# Altium PCB PCB_V1.0.0.PcbDoc
Units mil, origin at the board's own origin, x right, y up, seen from the top; angles counter-clockwise.
Board outline 1574.8 x 3937.01 mil, 2 copper layers (Top Layer, Bottom Layer); 42 components, 31 nets, 149 pads, 58 vias.
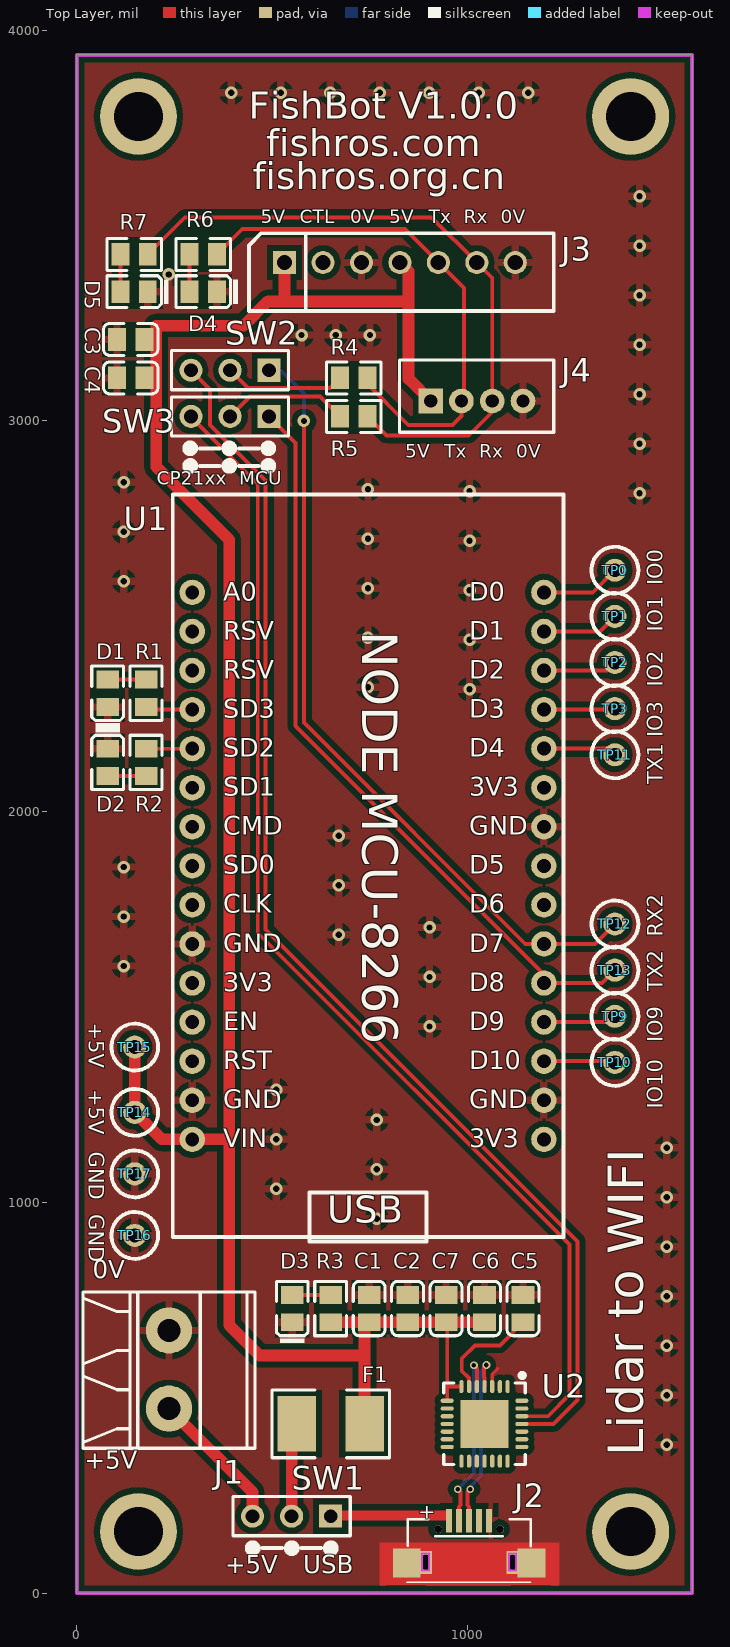
[diagram p0: Top Layer view]
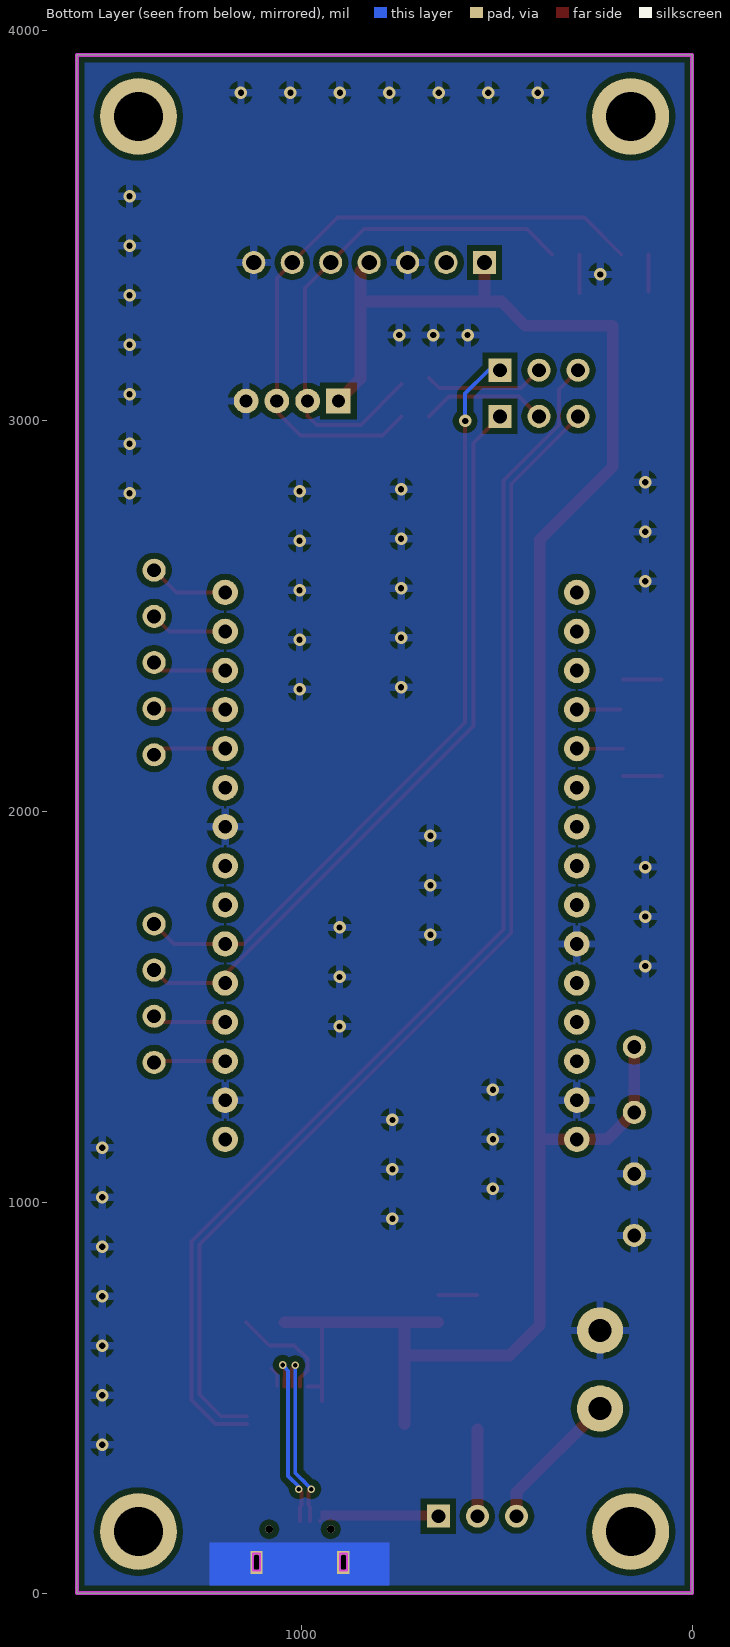
[diagram p1: Bottom Layer view, seen from below]
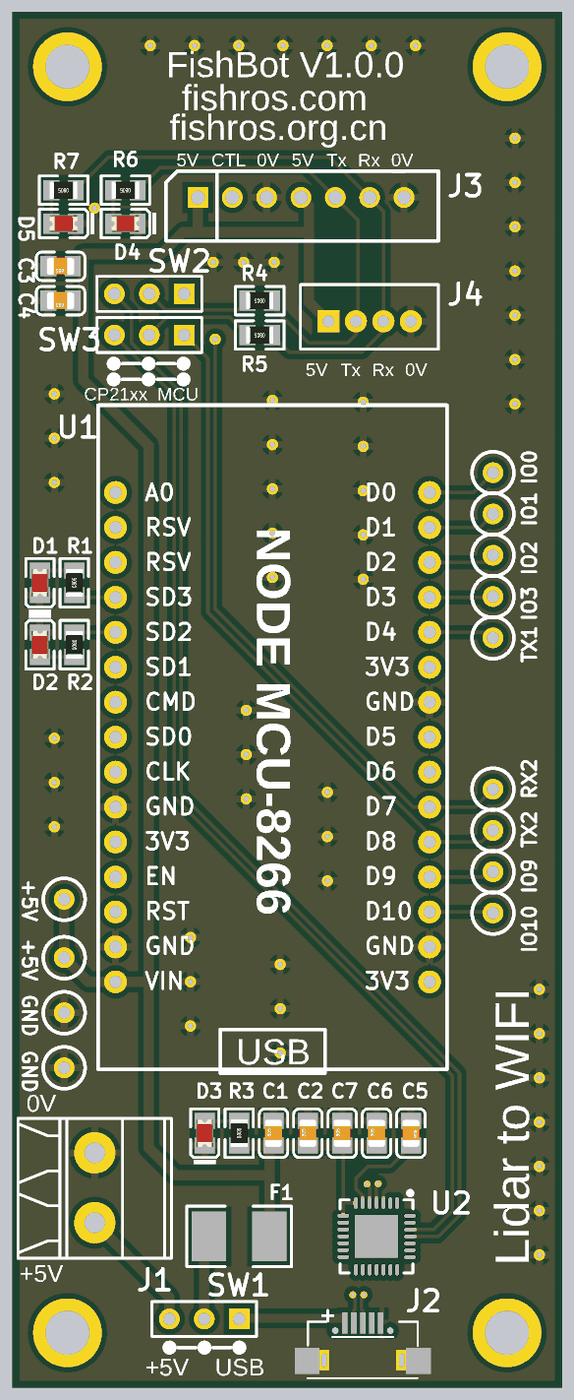
[diagram p2: 3D render of the assembled board from above, using the file's embedded part models]

## Layer stack, top to bottom
Top Layer: signal copper 1.4
Dielectric: dielectric 12.6, FR-4, Dk 4.8
Bottom Layer: signal copper 1.4

## Board outline
0,0 0,3937.01 1574.8,3937.01 1574.8,0

## Design rules (kind name [scope] priority, off if disabled: settings)
Clearance [All] p1: gap=8
ComponentClearance [All] p1: gap=0 collisioncheckmode=3 verticalgap=0 showdistances=FALSE
DiffPairsRouting DiffPair_UsbDiffPairsRouting [All] p1: maxlimit=10 minlimit=6 mostfreqgap=8 maxuncoupledlength=500
DiffPairsRouting [All] p2: maxlimit=10 minlimit=10 mostfreqgap=10 maxuncoupledlength=500
HoleSize [All] p1: absolutevalues=TRUE maxlimit=1000 minlimit=10 maxpercent=80.000 minpercent=20.000
HoleToHoleClearance [All] p1: gap=6 allowstackedmicrovias=TRUE
MatchedLengths DiffPair_UsbMatchedLengths [All] p1 off: tolerance=1000 checknetsindiffpair=TRUE checkdiffpairvsdiffpair=TRUE checkothers=TRUE
MinimumSolderMaskSliver [All] p1: minsoldermaskwidth=4
PlaneConnect [All] p1: planeconnectstyle=Relief reliefexpansion=20 reliefentries=4 reliefconductorwidth=20 reliefairgap=20
PolygonConnect [All] p1: connectstyle=Relief reliefconductorwidth=20 reliefentries=4 polygonreliefangle="90 Angle"
RoutingVias [All] p1: holewidth=16 width=32 viastyle="Through Hole" minholewidth=12 minwidth=20 maxholewidth=28 maxwidth=50
SilkToSilkClearance [All] p1: silktosilkclearance=0
SilkscreenOverComponentPads [All] p1: minsilkscreentomaskgap=1
SolderMaskExpansion [All] p1: expansion=0
Width DiffPair_UsbWidth [All] p1: maxlimit=100 minlimit=8 preferedwidth=10
Width [All] p2: maxlimit=100 minlimit=6 preferedwidth=8
20 further rules are at their usual default settings.

## Classes and differential pairs
differential pair USB: +D_P -D_N

## Components (designator, comment, footprint, x,y, rotation, side; value= is the part's Value field where it differs from the comment)
C1 "4.7uF (475) 10% 25V" 0805_C 748.03,728.35 r90 top
C2 "100nF(104) 10% 50V" 0805_C 846.46,728.35 r90 top
C3 "10uF (106) 10% 25V" 0805_C 137.8,3208.66 r180 top
C4 "100nF(104) 10% 50V" 0805_C 137.8,3110.24 r180 top
C5 "100nF(104) 10% 50V" 0805_C 1141.73,728.35 r270 top
C6 "4.7uF (475) 10% 25V" 0805_C 1043.31,728.35 r90 top
C7 "100nF(104) 10% 50V" 0805_C 944.88,728.35 r90 top
D1 "红灯 0805" 0805_LED_S1 78.74,2303.15 r90 top
D2 "翠绿 0805" 0805_LED_S1 78.74,2125.98 r270 top
D3 "黄灯 0805" 0805_LED_S1 551.18,728.35 r90 top
D4 "翠绿 0805" 0805_LED_S1 323.61,3330.97 r180 top
D5 "黄灯 0805" 0805_LED_S1 146.44,3330.97 r180 top
F1 "Fuse" 1812 649.61,433.07 r0 top
J1 "Header 2" MKDS3_2RMM 236.22,472.44 r90 top
J2 "USB_M" USB-MICRO-A 1003.94,98.43 r0 top
J3 "Header 7" 5267-7A 531.5,3405.51 r0 top
J4 "Header 4" PH2.0-4P_1 905.51,3051.18 r0 top
R1 "2.2KΩ (2201) ±1%" 0805_R 177.17,2303.15 r90 top
R2 "2.2KΩ (2201) ±1%" 0805_R 177.17,2125.98 r270 top
R3 "4.7KΩ (4701) ±1%" 0805_R 649.61,728.35 r90 top
R4 "47Ω (47R0) ±1%" 0805_R 708.66,3110.24 r180 top
R5 "47Ω (47R0) ±1%" 0805_R 708.66,3011.81 r180 top
R6 "4.7KΩ (4701) ±1%" 0805_R 323.61,3426.39 r180 top
R7 "4.7KΩ (4701) ±1%" 0805_R 146.44,3426.39 r180 top
SW1 "Header 3" HDR3X1_A 649.61,196.85 r180 top
SW2 "Header 3" HDR3X1_A 492.13,3129.92 r180 top
SW3 "Header 3" HDR3X1_A 492.13,3011.81 r180 top
TP0 "IO0" CHECK-A 1377.01,2618.11 r90 top
TP1 "IO1" CHECK-A 1377.01,2500 r0 top
TP2 "IO2" CHECK-A 1377.01,2381.89 r0 top
TP3 "IO3" CHECK-A 1377.01,2263.78 r0 top
TP9 "IO9" CHECK-A 1377.01,1476.38 r0 top
TP10 "IO10" CHECK-A 1377.01,1358.27 r90 top
TP11 "TX1" CHECK-A 1377.01,2145.67 r90 top
TP12 "RX2" CHECK-A 1377.01,1712.6 r90 top
TP13 "TX2" CHECK-A 1377.01,1594.49 r90 top
TP14 "+5V" CHECK-A 148.11,1230.47 r90 top
TP15 "+5V" CHECK-A 148.11,1397.64 r90 top
TP16 "GND" CHECK-A 148.11,915.51 r90 top
TP17 "GND" CHECK-A 148.11,1072.99 r90 top
U1 "NODE MCU-8266" ESP8266_CP2102 295.28,1161.42 r0 top
U2 "CP2102-GMR" QFN-28_5x5x05P 1043.31,433.07 r180 top

## Footprints (in the part's own frame and the unit in brackets; to place one, negate y for a bottom-side part, rotate by r counter-clockwise, add the part's x,y. Pads: shape width x height; smd on the part's side, far side on the other; paste and mask are expansions set on the pad)
0805_C [mm]
  rect 1.16x1.47 smd: 1(-0.89,0) 2(0.89,0)
  silkscreen extent -1.77,-1.04 1.77,1.04, body extent -1,-0.63 1,0.63, height 0.77
0805_LED_S1 [mm]
  rect 1.16x1.47 smd: A(0.89,0) K(-0.89,0)
  silkscreen extent -2.24,-1.04 1.77,1.03, body extent -1.01,-0.63 1.01,0.62, height 1.1
0805_R [mm]
  rect 1.16x1.47 smd: 1(-0.89,0) 2(0.89,0)
  silkscreen extent -1.77,-1.04 1.77,1.03, body extent -1,-0.63 1,0.63, height 0.49
1812 [mm] "保险丝"
  rect 2.5x3.6 smd: 1(-2.2,0) 2(2.2,0)
  silkscreen extent -3.81,-2.2 3.81,2.2, body extent -2.54,-1.65 2.67,1.65, height 1.2
5267-7A [mm]
  rect 1.5x1.5 hole 1: 1(0,0)
  round 1.5 hole 1: 2(2.5,0) 3(5,0) 4(7.5,0) 5(10,0) 6(12.5,0) 7(15,0)
  silkscreen extent -2.32,-3.15 17.5,1.91
CHECK-A [mm] "Connector; Plug"
  round 1.5 hole 0.9: 1(0,0)
  silkscreen extent -1.52,-1.52 1.52,1.52
ESP8266_CP2102 [mm]
  round 1.65 hole 0.9: 1(0,35.56) 2(0,33.02) 3(0,30.48) 4(0,27.94) 5(0,25.4) 6(0,22.86) 7(0,20.32) 8(0,17.78) 9(0,15.24) 10(0,12.7) 11(0,10.16) 12(0,7.62) 13(0,5.08) 14(0,2.54) 15(0,0) 16(22.86,0) 17(22.86,2.54) 18(22.86,5.08) 19(22.86,7.62) 20(22.86,10.16) 21(22.86,12.7) 22(22.86,15.24) 23(22.86,17.78) 24(22.86,20.32) 25(22.86,22.86) 26(22.86,25.4) 27(22.86,27.94) 28(22.86,30.48) 29(22.86,33.02) 30(22.86,35.56)
  silkscreen extent -1.27,-6.63 24.13,41.91
HDR3X1_A [mm] "Connector; Header; 3 Position"
  rect 1.5x1.5 hole 0.9: 1(0,0)
  round 1.5 hole 0.9: 2(2.54,0) 3(5.08,0)
  silkscreen extent -1.27,-1.27 6.35,1.27
MKDS3_2RMM [mm]
  round 3 hole 1.5: 1(-0.004,0.011) 2(5.076,0.011)
  silkscreen extent -2.59,-5.58 7.57,5.6
PH2.0-4P_1 [mm]
  rect 1.6x1.6 hole 0.86: 1(0,0)
  round 1.6 hole 0.86: 2(2,0) 3(4,0) 4(6,0)
  silkscreen extent -2.03,-2.03 8,2.67
QFN-28_5x5x05P [mm]
  rect 3.13x3.13 smd mask+0.051: 0(0,0)
  oval 0.28x0.85 smd mask+0.051: 1(-1.5,-2.425) 2(-1,-2.425) 3(-0.5,-2.425) 4(0,-2.425) 5(0.5,-2.425) 6(1,-2.425) 7(1.5,-2.425) 15(1.5,2.425) 16(1,2.425) 17(0.5,2.425) 18(0,2.425) 19(-0.5,2.425) 20(-1,2.425) 21(-1.5,2.425)
  oval 0.85x0.28 smd mask+0.051: 8(2.425,-1.5) 9(2.425,-1) 10(2.425,-0.5) 11(2.425,0) 12(2.425,0.5) 13(2.425,1) 14(2.425,1.5) 22(-2.425,1.5) 23(-2.425,1) 24(-2.425,0.5) 25(-2.425,0) 26(-2.425,-0.5) 27(-2.425,-1) 28(-2.425,-1.5)
  silkscreen extent -2.65,-3.3 2.65,2.65
USB-MICRO-A [mm]
  rect 0.4x1.55 smd: 1(-1.3,2.2) 2(-0.65,2.2) 3(0,2.2) 4(0.65,2.2) 5(1.3,2.2)
  rect 1.8x1.9 smd: 6(-4.05,-0.55) 6(4.05,-0.55)
  rect 0.8x1.5 hole 0.4 slot 1 at 90 deg: 6(-2.825,-0.5) 6(2.825,-0.5)
  round 0.5 hole 0.5 unplated: ""(-2,1.65) ""(2,1.65)
  Keep-Out Layer lines w0.127: -3.054,-1.043 -2.596,-1.043 -2.596,0.075 -3.054,0.075 -3.054,-1.043 ; 2.596,-1.043 3.054,-1.043 3.054,0.075 2.596,0.075 2.596,-1.043
  silkscreen extent -4.05,-1.8 4,2.3

## Part data
C1 C6: library part "0805 4.7uF (475) 10% 25V", "贴片电容"
C2 C4 C5 C7: library part "0805 100nF(104) 10% 50V", "贴片电容"
C3: library part "0805 10uF (106) 10% 25V", "贴片电容"
D1: library part "0805 红灯", "发光二极管"
D2 D4: library part "0805 翠绿", "发光二极管"
D3 D5: library part "0805 黄灯", "发光二极管"
F1: library part "Fuse 2", "保险丝"
J1 J4 SW1 SW2 SW3: "接插件"
J2: "MicroUSB接口"
J3: "Header, 7-Pin"
R1 R2: library part "0805 2.2KΩ (2201) 1%", "贴片电阻"
R3 R6 R7: library part "0805 4.7KΩ (4701) 1%", "贴片电阻"
R4 R5: library part "0805 47Ω (47R0) 1%", "贴片电阻"
TP0 TP1 TP2 TP3 TP9 TP10 TP11 TP12 TP13 TP14 TP15 TP16 TP17: library part TP
U1: library part NodeMCU_8266
U2: library part CP2102-GMR_[C6568], "USB"

## Free pads (board coordinates)
  round 196.85 hole 125.98: 0(157.48,157.48) 0(157.48,3779.53) 0(1417.32,157.48) 0(1417.32,3779.53)

## Via types
v1: diameter 32, hole 16, Top Layer to Bottom Layer, 54 vias
v2: diameter 20, hole 12, Top Layer to Bottom Layer, 4 vias

## Nets (pads, with @x,y where several pads share a name; then routed paths per layer and width w, separated by ;. In a path a pad name is that pad's centre, name@x,y a point inside that pad or via, vN(x,y) a via of type N, cw(c..) or ccw(c..) an arc to the next point about the centre after c; other vN are vias at no path point)
+5V: C1.1 C2.1 C3.1 C4.1 C6.1 C7.1 F1.2 J3.1 J3.4 J4.1 R3.1 TP14.1 TP15.1 U1.15 U2.7 U2.8 | length 5499.6
  Top Layer w10: C7.1@944.88,690.35 C7.1 ; U2.8 C7.1@947.83,690.35 ; 949.38,528.54 U2.7
  Top Layer w30: TP15.1 TP14.1 217.17,1161.42 U1.15 388.42,1161.42 ; 531.5,3308.5 J3.1 ; R3.1 C1.1 ; 735.22,608 468,608 390,686 390,2696 203,2883 203,3110.24 203,3208.66 203,3244 427,3244 489,3306 849,3306 ; F1.2 736.22,681.5 C1.1 ; J3.4 849,3383.28 849,3306 ; J4.1 849,3107.69 849,3306 ; C6.1 C7.1 C2.1 C1.1
+5V_IN: J1.1 SW1.3 | length 364
  Top Layer w30: J1.1 449.61,258.46 SW1.3
CP_RXD: SW2.3 U2.25 | length 3213
  Top Layer w10: SW2.3 341,3081.05 341,2989.28 483,2847.28 483,1698.28 1281,900.28 1281,494 1220.07,433.07 U2.25
CP_TXD: SW3.3 U2.26 | length 3050.2
  Top Layer w10: SW3.3 292.13,3009.87 463,2839 463,1690 1261,892 1261,508 1205.76,452.76 U2.26
D_N: J2.2 U2.5 | length 478.1
  Top Layer w10: v2(975,266) 982.14,258.86 982.14,224.8 978.35,221 J2.2 ; v2(1016,583) 1024.46,574.54 1024.46,551.84 1023.62,551 U2.5
  Bottom Layer w10: v2(975,266) 984,275 984,275.53 997.47,289 998,289 1016,307 v2(1016,583)
D_P: J2.3 U2.4 | length 478.5
  Top Layer w10: J2.3 1003.94,221 1000.14,224.8 1000.14,259.14 v2(1007,266) ; U2.4 1043.31,551 1042.46,551.84 1042.46,578.46 v2(1048,584)
  Bottom Layer w10: v2(1007,266) 1007,272.54 1034,299.54 1034,568.47 1039,573.47 1039,575 v2(1048,584)
GND: C1.2 C2.2 C3.2 C4.2 C5.1 C6.2 C7.2 D1.K D2.K D3.K D4.K D5.K J1.2 J2.5 J2.6 J3.3 J3.7 J4.4 TP16.1 TP17.1 U1.10 U1.14 U1.17 U1.24 U2.3 | length 52.4
  Top Layer w8: U2.3 1062.99,560.68 1077.31,575
  other v1: 1510,380 1510,506.67 1510,633.33 1510,760 1510,886.67 767.23,957.89 1510,1013.33 510,1035 767.23,1084.56 1510,1140 510,1161.67 767.23,1211.22 510,1288.33 902.56,1450.28 902.56,1576.95 120,1605 670,1685 902.56,1703.61 120,1731.67 670,1811.67 120,1858.33 670,1938.33 1005,2313.33 745,2318.33 1005,2440 745,2445 1005,2566.67 745,2571.67 120,2590 1005,2693.33 745,2698.33 120,2716.67 1440,2815 1005,2820 745,2825 120,2843.33 1440,2941.67 1440,3068.33 1440,3195 575,3220 662.5,3220 750,3220 1440,3321.67 235,3375 1440,3448.33 1440,3575 395,3840 521.67,3840 648.33,3840 775,3840 901.67,3840 1028.33,3840 1155,3840
IO0: TP0.1 U1.30 | length 205.2
  Top Layer w10: U1.30 1320.31,2561.42 TP0.1
IO1: TP1.1 U1.29 | length 197.7
  Top Layer w10: U1.29 1338.43,2461.42 TP1.1
IO2: TP2.1 U1.28 | length 190.2
  Top Layer w10: U1.28 1356.54,2361.42 TP2.1
IO3: TP3.1 U1.27 | length 182.7
  Top Layer w10: U1.27 1374.65,2261.42 TP3.1
IO9: TP9.1 U1.19 | length 187.9
  Top Layer w10: U1.19 1362.05,1461.42 TP9.1
IO10: TP10.1 U1.18 | length 183
  Top Layer w10: U1.18 1373.86,1361.42 TP10.1
LED_GREEN: R2.1 U1.5 | length 117.7
  Top Layer w10: R2.1 U1.5@294.88,2161.02
LED_RED: R1.1 U1.4 | length 111.4
  Top Layer w10: R1.1@183.86,2261.42 U1.4
LIDAR_RX: J3.6 J4.3 R5.1 R7.1 | length 1692.4
  Top Layer w10: R7.1 276.09,3521 908.13,3521 J3.6 1062.99,3366.14 J4.3 1062.99,3022.99 1003,2963 792.51,2963 R5.1
LIDAR_TX: J3.5 J4.2 R4.1 R6.1 | length 1344.2
  Top Layer w10: R6.1 423.25,3491 839.71,3491 J3.5 990.71,3340 990.71,3057.64 J4.2 984.25,3013.25 961,2990 848,2990 R4.1@743.7,3094.3
MCU_RX2: SW2.1 TP12.1 U1.21 | length 1958.9
  Top Layer w10: v1(581,3000) 581,2228 1147.58,1661.42 U1.21@1175.58,1661.42 ; U1.21 1325.83,1661.42 TP12.1
  Bottom Layer w10: SW2.1@521.08,3129.92 581,3070 v1(581,3000)
MCU_TX1: TP11.1 U1.26 | length 188.3
  Top Layer w10: U1.26 1361.26,2161.42 TP11.1
MCU_TX2: SW3.1 TP13.1 U1.20 | length 1914.8
  Top Layer w10: SW3.1 560,2943.94 560,2219 U1.20@1195.28,1583.72 ; U1.20 1343.94,1561.42 TP13.1
MOTOCTL: J3.2
NetC5_2: C5.2 U2.6 | length 274.7
  Top Layer w10: U2.6 1003.94,550.06 985,569 985,600 1019,634 1082.43,634 C5.2
NetD1_A: D1.A R1.2 | length 98.4
  Top Layer w10: D1.A R1.2
NetD2_A: D2.A R2.2 | length 98.4
  Top Layer w10: D2.A R2.2
NetD3_A: D3.A R3.2 | length 98.4
  Top Layer w10: D3.A R3.2
NetD4_A: D4.A R6.2 | length 98.4
  Top Layer w10: D4.A@288.57,3327.97 D4.A R6.2
NetD5_A: D5.A R7.2 | length 95.4
  Top Layer w10: D5.A R7.2
NetF1_1: F1.1 SW1.2 | length 222.8
  Top Layer w30: SW1.2 F1.1@549.61,419.69
NetR4_2: R4.2 SW2.2 | length 311.4
  Top Layer w10: SW2.2 438.05,3084 647.39,3084 R4.2
NetR5_2: R5.2 SW3.2 | length 323.9
  Top Layer w10: SW3.2 443.32,3063 622.43,3063 R5.2
VDDUSB: J2.1 SW1.1 | length 1.7
  Top Layer w10: J2.1@951.57,186.23 J2.1
pads on no net: J2. J2.4 U1.1 U1.2 U1.3 U1.6 U1.7 U1.8 U1.9 U1.11 U1.12 U1.13 U1.16 U1.22 U1.23 U1.25 U2.0 U2.1 U2.2 U2.9 U2.10 U2.11 U2.12 U2.13 U2.14 U2.15 U2.16 U2.17 U2.18 U2.19 U2.20 U2.21 U2.22 U2.23 U2.24 U2.27 U2.28

## Polygon pours and split planes (outlines as drawn)
GND on Bottom Layer "Bottom Layer-No Net" (solid, pour order 1000): 0,3937.01 1574.8,3937.01 1574.8,0 0,0 0,3937.01
GND on Top Layer "Bottom Layer-No Net" (solid, remove dead copper, pour order 1001): 0,3937.01 1574.8,3937.01 1574.8,0 0,0 0,3937.01

## Keep-outs
Keep-Out Layer:
  the board outline again, w10

## Other copper
Top Layer:
  rectangle net GND: 775,20 1235,130
  rectangle net VDDUSB: 649.61,186.23 951.57,212
Bottom Layer:
  rectangle net GND: 775,20 1235,130

## Silkscreen, mask and mechanical layers (free items; w line width, h text height)
Top Overlay:
  circle w20: c490,2930 r10
  circle w20: c290,2930 r10
  circle w20: c390,2930 r10
  circle w20: c390,2885 r10
  circle w20: c290,2885 r10
  circle w20: c490,2885 r10
  circle w20: c650,115 r10
  circle w20: c450,115 r10
  circle w20: c550,115 r10
  lines w10: 315,2885 365,2885 ; 315,2930 365,2930 ; 415,2885 465,2885 ; 415,2930 465,2930 ; 475,115 525,115 ; 575,115 625,115
  text "FishBot V1.0.0" at 440,3750 h118.11
  text "fishros.com" at 485,3655 h118.11
  text "fishros.org.cn" at 450,3570 h118.11
  text "5V" at 470,3495 h59.06
  text "CTL" at 570,3495 h59.06
  text "0V" at 700,3495 h59.06
  text "5V" at 800,3495 h59.06
  text "0V" at 1085,3495 h59.06
  text "Tx" at 900,3494.16 h59.06
  text "Rx" at 990,3494.16 h59.06
  text "5V" at 840,2895 h59.06
  text "0V" at 1125,2895 h59.06
  text "Tx" at 940,2894.16 h59.06
  text "Rx" at 1030,2894.16 h59.06
  text "CP21xx" at 205,2825 h59.06
  text "MCU" at 415,2825 h59.06
  text "0V" at 40,790 h78.74
  text "Lidar to WIFI" at 1480,350 h157.48 r90
  text "+5V" at 20.39,303.42 h78.74
  text "+5V" at 380,35 h78.74
  text "USB" at 580,35 h78.74

## Text inside footprints (layer, text, board x,y; h text height)
J2: Top Overlay "+" at 874.02,190.94 h39.37
U1: Top Overlay "USB" at 640.28,925.2 h118.11; Top Overlay "A0" at 374.02,2539.37 h47.24; Top Overlay "RSV" at 374.02,2439.54 h47.24; Top Overlay "RSV" at 374.02,2339.71 h47.24; Top Overlay "SD3" at 374.02,2239.88 h47.24; Top Overlay "SD2" at 374.02,2140.04 h47.24; Top Overlay "SD1" at 374.02,2040.21 h47.24; Top Overlay "CMD" at 374.02,1940.38 h47.24; Top Overlay "SD0" at 374.02,1840.55 h47.24; Top Overlay "CLK" at 374.02,1740.72 h47.24; Top Overlay "GND" at 374.02,1640.89 h47.24; Top Overlay "3V3" at 374.02,1541.06 h47.24; Top Overlay "EN" at 374.02,1441.23 h47.24; Top Overlay "RST" at 374.02,1341.39 h47.24; Top Overlay "GND" at 374.02,1241.56 h47.24; Top Overlay "VIN" at 374.02,1141.73 h47.24; Top Overlay "D0" at 1003.94,2539.37 h47.24; Top Overlay "D1" at 1003.94,2439.54 h47.24; Top Overlay "D2" at 1003.94,2339.71 h47.24; Top Overlay "D3" at 1003.94,2239.88 h47.24; Top Overlay "D4" at 1003.94,2140.04 h47.24; Top Overlay "3V3" at 1003.94,2040.21 h47.24; Top Overlay "GND" at 1003.94,1940.38 h47.24; Top Overlay "D5" at 1003.94,1840.55 h47.24; Top Overlay "D6" at 1003.94,1740.72 h47.24; Top Overlay "D7" at 1003.94,1640.89 h47.24; Top Overlay "D8" at 1003.94,1541.06 h47.24; Top Overlay "D9" at 1003.94,1441.23 h47.24; Top Overlay "D10" at 1003.94,1341.39 h47.24; Top Overlay "GND" at 1003.94,1241.56 h47.24; Top Overlay "3V3" at 1003.94,1141.73 h47.24